# EAGLE board TuringPanel (EAGLE 7.4.0)
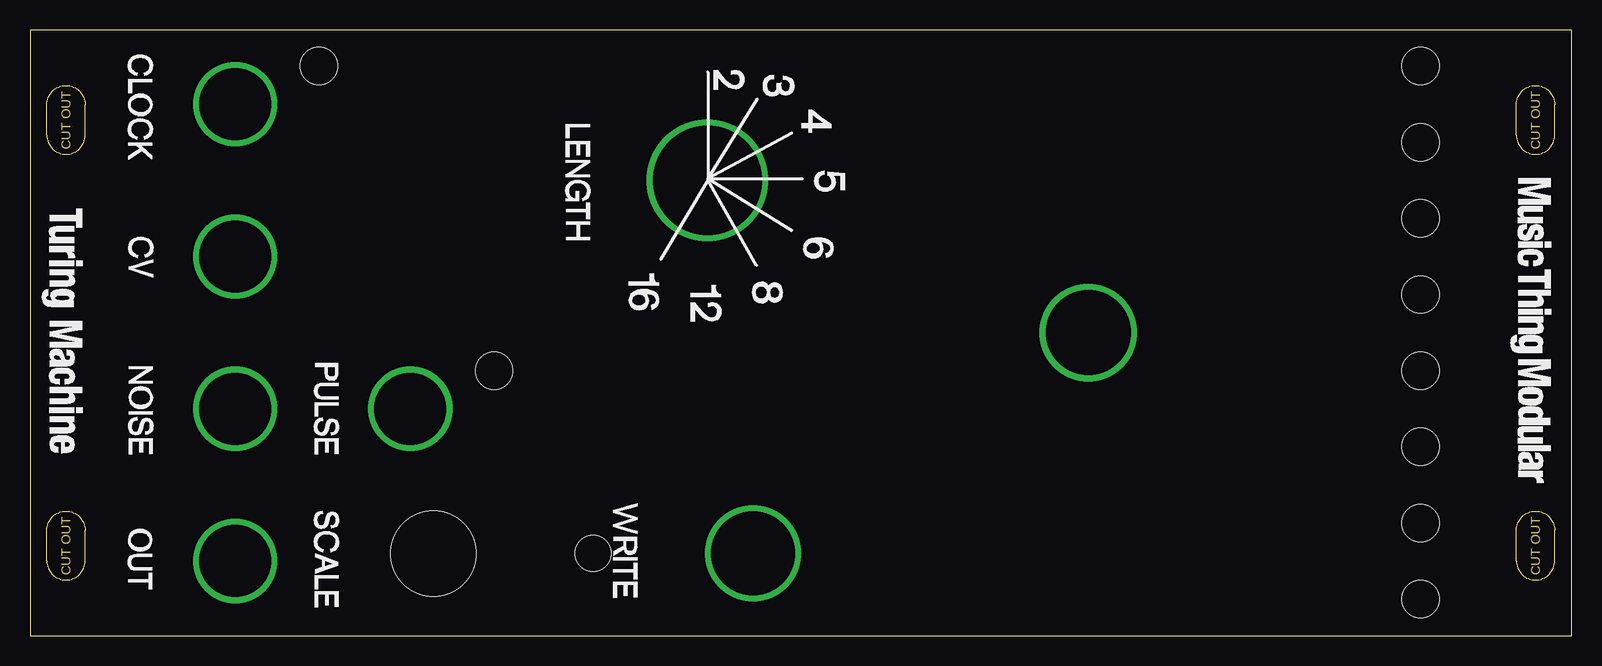
[diagram p0: board, top side]
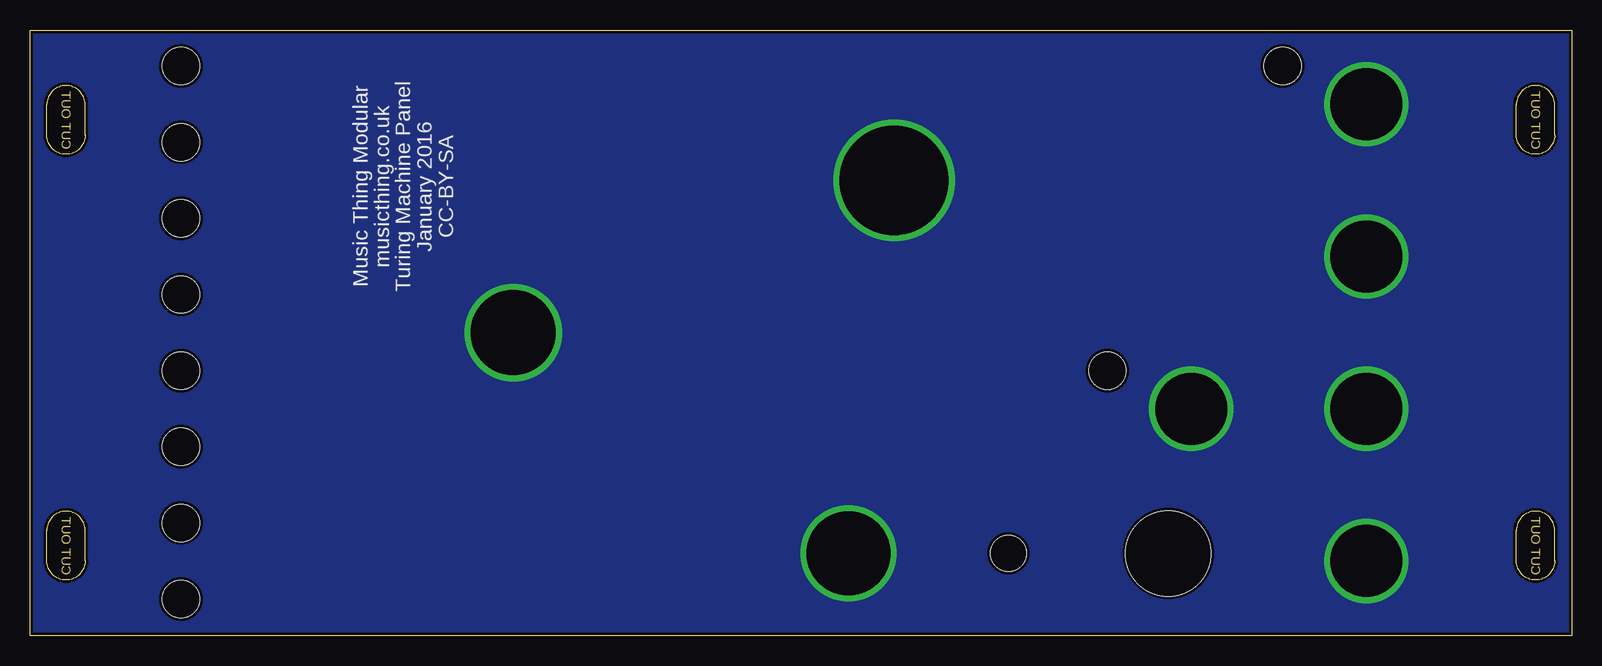
[diagram p1: board, bottom side, seen from below]

Size 128.5 x 50.5 mm. Coordinates in mm from the lower left corner, seen from the top.
Outline: 0,50.5 0,0 128.5,0 128.5,50.5 0,50.5
Copper layers (1*2*15*16): Top 0.035mm / dielectric 0.2mm / Route2 0.0175mm / dielectric 1.1mm / Route15 0.0175mm / dielectric 0.2mm / Bottom 0.035mm
Design rules "SeeedStudio_DRU_no_angle_20130527": minimum track width 6mil, minimum drill 12mil, track to track 6mil, track to pad 6mil, pad to pad 6mil, via to via 6mil, smd to smd 0mil, copper to edge 10mil, drill to drill 10mil, minimum pad ring 6mil, minimum via ring 6mil, stop-mask expansion 2mil, vias tented up to drill 25mil, thermal gap 10mil
Net classes: 0 default: width 0.203 mm; 1 power: width 0.406 mm; 2 ground: width 0.406 mm
Holes 3.1 mm at 24.09,47.49 38.69,22.09 115.91,47.49 115.91,41.14 115.91,34.79 115.91,28.44 115.91,22.09 115.91,15.74 115.91,9.39 115.91,3.04
Holes 7.1 mm at 33.61,6.85
Holes 3 mm at 46.95,6.85

## Placement (x,y rotation side)
U$1  [SLOT_HOLE]  3,43 90 top
U$2  [SLOT_HOLE]  3,7.5 90 top
U$3  [SLOT_HOLE]  125.5,43 90 top
U$4  [SLOT_HOLE]  125.5,7.5 90 top

## Library data of the parts
U$1-U$4 = MusicThingModular

## Tracks (layer width: path | path; a pad name or v marks a point on that pad's centre or on a via)
GND  (via drill 6, 7, 7.1, 9.1)
  other vias: 56.47,37.97 17.1,44.31 17.1,31.61 17.1,18.91 17.1,6.21 31.7,18.91 88.22,25.27 60.28,6.85
  pour Bottom: 0,50.8 131.44,51.44 131.44,-0.64 -1.27,-1.27

## Text on the board
bPlace: Music Thing Modular / musicthing.co.uk / Turing Machine Panel / January 2016 / CC-BY-SA